# Altium PCB Graviton.PcbDoc
Units mm, origin at the board's own origin, x right, y up, seen from the top; angles counter-clockwise.
Board outline 200 x 200 mm, 10 copper layers (Top Layer, Signal Layer 1, Signal Layer 2, Signal Layer 3, Signal Layer 4, Signal Layer 5, Signal Layer 6, Signal Layer 7, Signal Layer 8, Bottom Layer), stack 1.555 mm thick; 32 components, 1 nets, 32 pads, 0 vias.
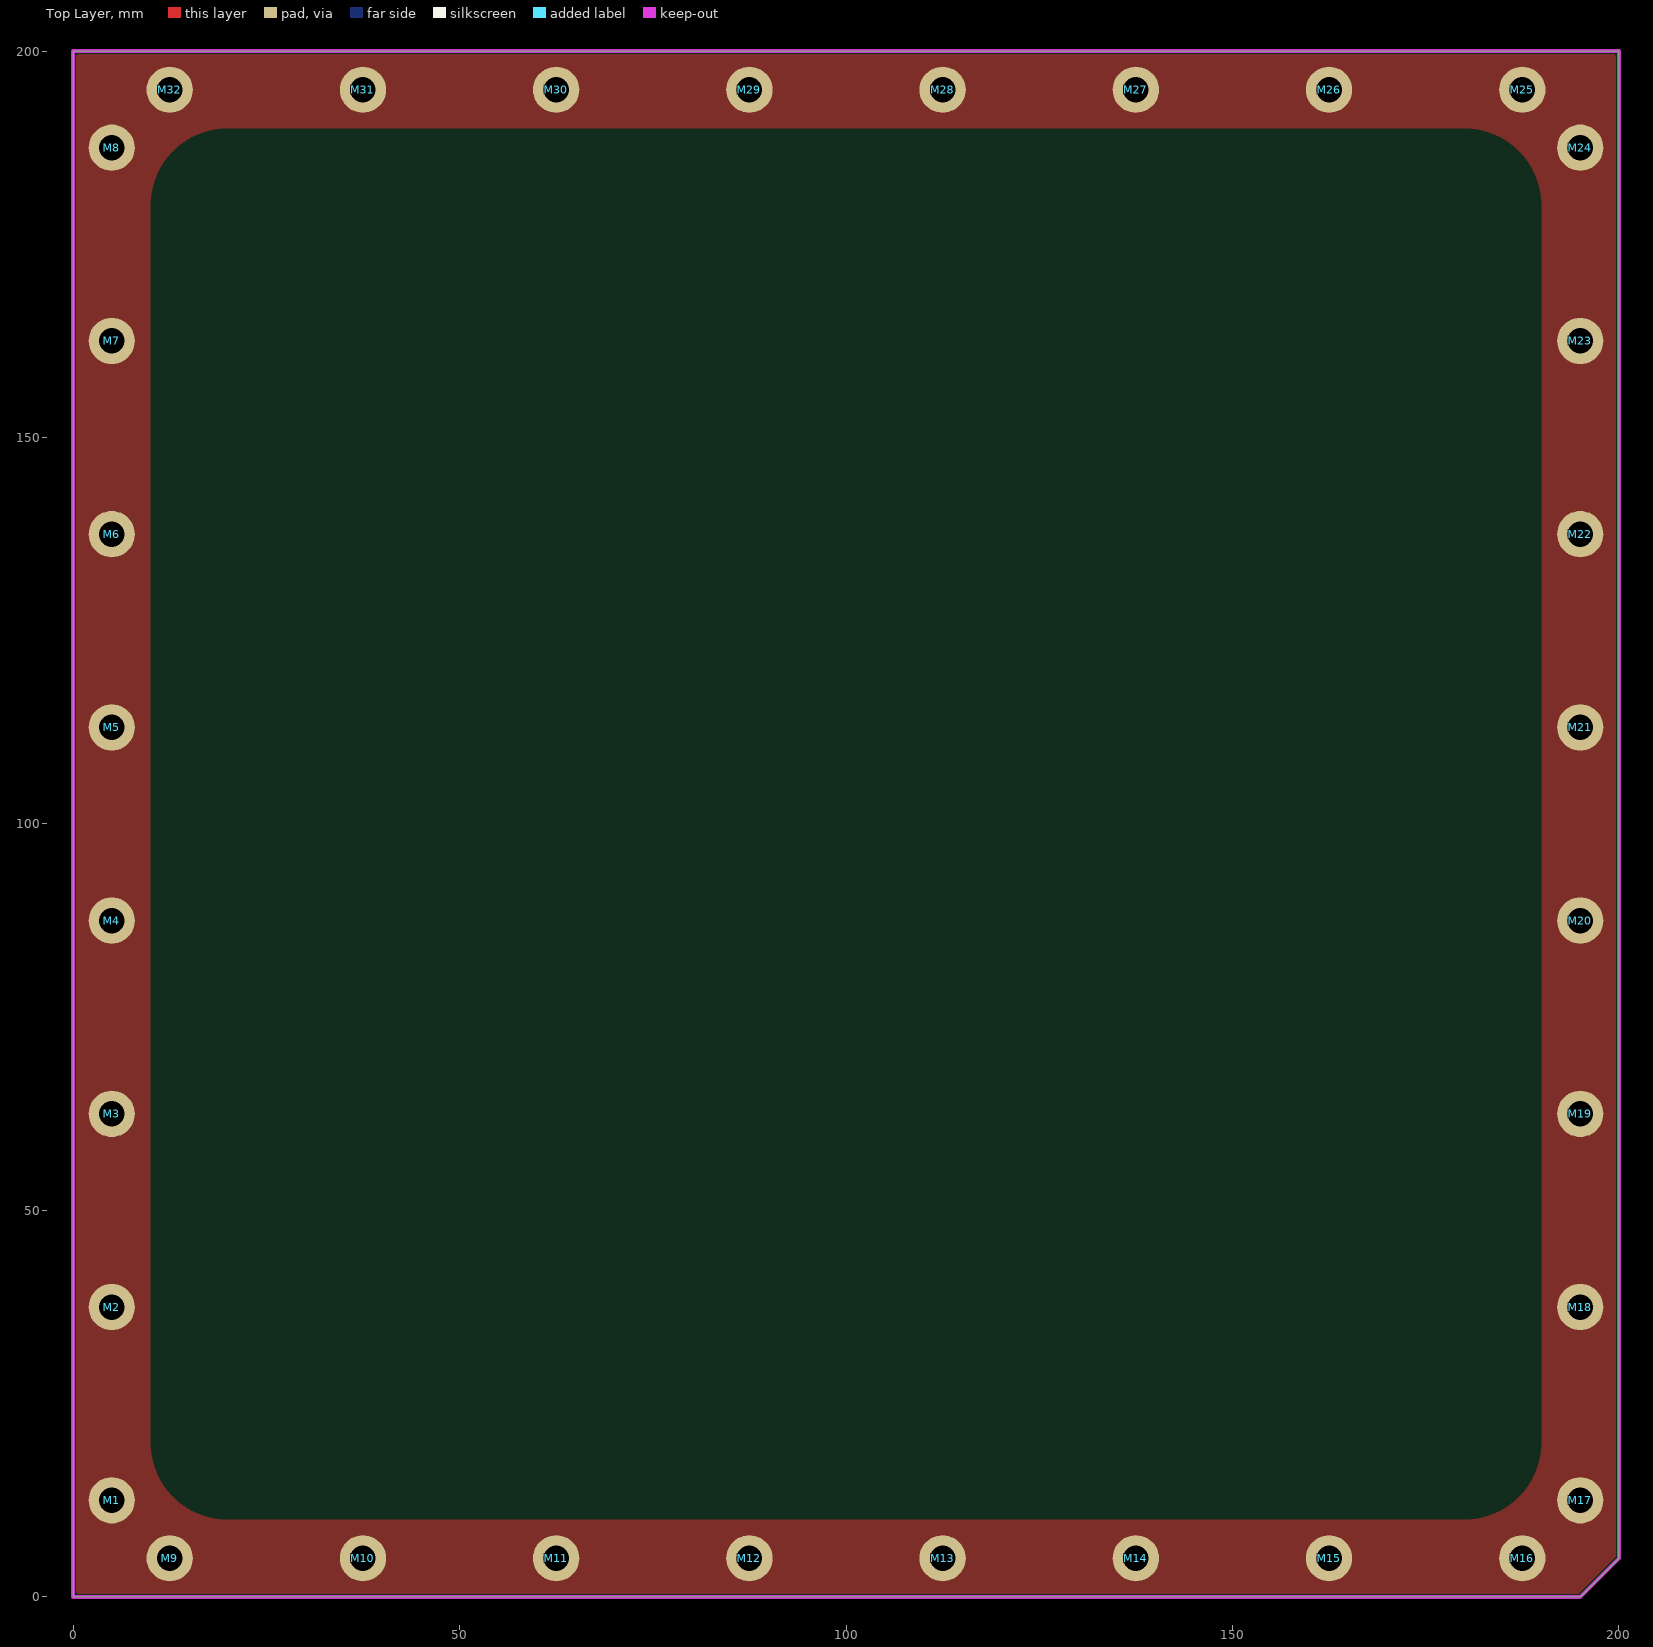
[diagram p0: Top Layer view]
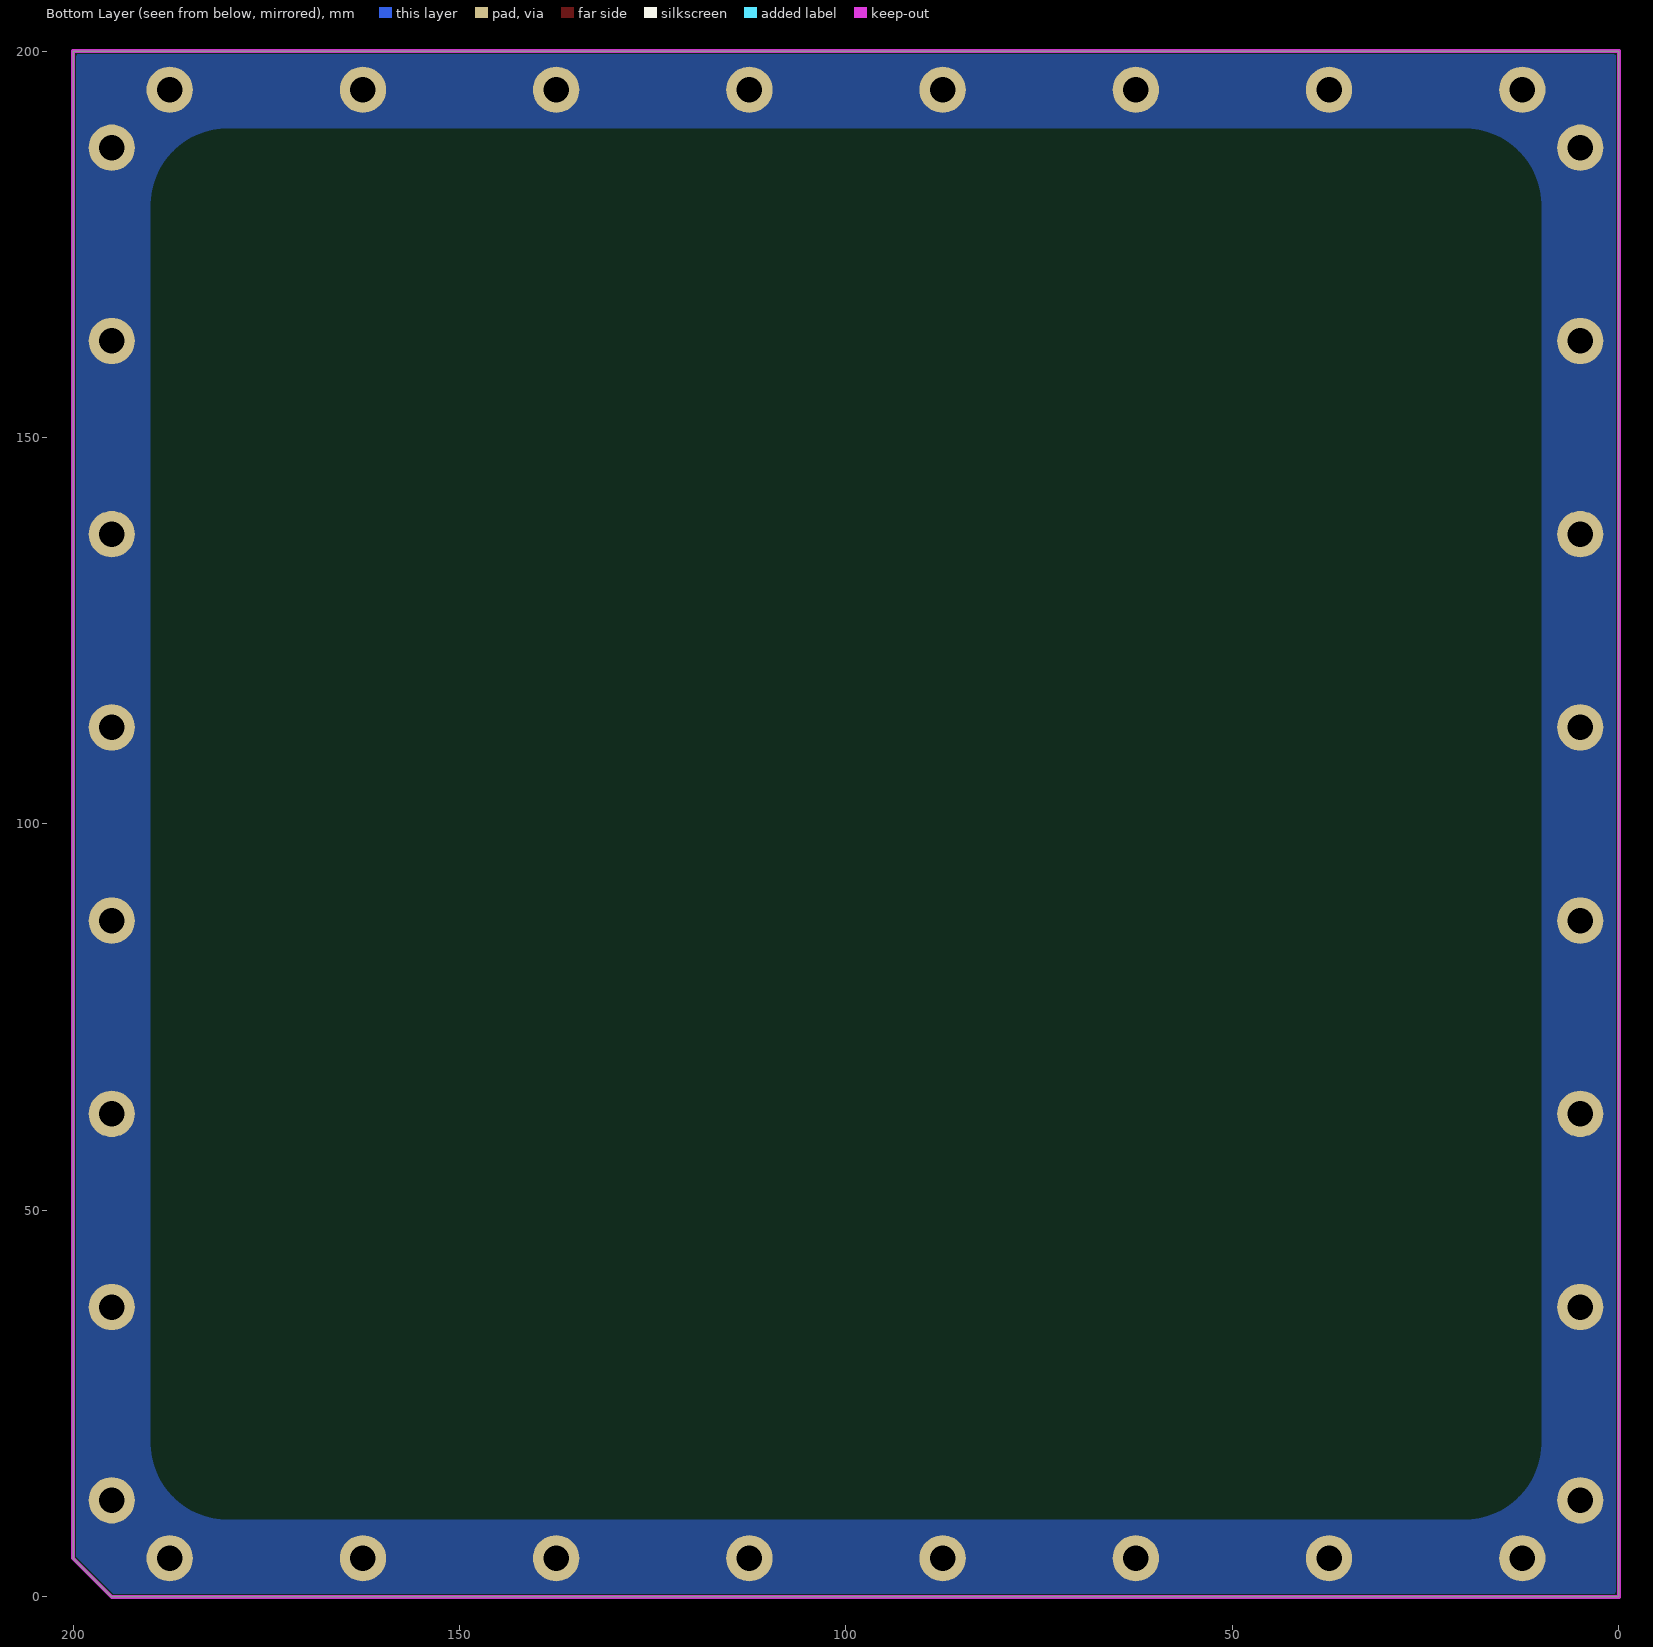
[diagram p1: Bottom Layer view, seen from below]

## Layer stack, top to bottom
Top Solder: solder mask 0.0102, Solder Resist, Dk 3.5
Top Layer: signal copper 0.036
Dielectric1: core 0.1448, FR408, Dk 3.67
Signal Layer 1: signal copper 0.018
Dielectric 3: prepreg 0.1448, FR408, Dk 3.67
Signal Layer 2: signal copper 0.018
Dielectric 4: core 0.1448, FR408, Dk 3.67
Signal Layer 3: signal copper 0.018
Dielectric 5: prepreg 0.1448, FR408, Dk 3.67
Signal Layer 4: signal copper 0.036
Dielectric 6: core 0.1448, FR408, Dk 3.67
Signal Layer 5: signal copper 0.036
Dielectric 7: prepreg 0.1448, FR408, Dk 3.67
Signal Layer 6: signal copper 0.018
Dielectric 8: core 0.1448, FR408, Dk 3.67
Signal Layer 7: signal copper 0.018
Dielectric 9: prepreg 0.1448, FR408, Dk 3.67
Signal Layer 8: signal copper 0.018
Dielectric 2: core 0.1448, FR408, Dk 3.67
Bottom Layer: signal copper 0.036
Bottom Solder: solder mask 0.0102, Solder Resist, Dk 3.5

## Board outline
0,0 195,0 200,5 200,200 0,200

## Design rules (kind name [scope] priority, off if disabled: settings)
Clearance [All] p1: gap=0.127
ComponentClearance [All] p1 off: gap=0.254 collisioncheckmode=3 verticalgap=0.254 showdistances=FALSE
HoleSize [All] p1: absolutevalues=TRUE maxlimit=25.4 minlimit=0.254 maxpercent=80.000 minpercent=20.000
PolygonConnect [All] p1: connectstyle=Direct reliefconductorwidth=0.254 reliefentries=4 polygonreliefangle="90 Angle" airgapwidth=0.254
RoutingVias [All] p1: holewidth=0.711 width=1.27 viastyle="Through Hole" minholewidth=0.711 minwidth=1.27 maxholewidth=0.711 maxwidth=1.27
SilkToSolderMaskClearance SilkscreenOverComponentPads [IsPad] p1: minsilkscreentomaskgap=0.254 clearancetoexposedcopper=TRUE
SolderMaskExpansion [All] p1: expansion=0.102
Width [All] p1: maxlimit=500 minlimit=0.254 preferedwidth=0.254
27 further rules are at their usual default settings.

## Classes and differential pairs
channel class sdram: SDRAM1 SDRAM2 SDRAM3 SDRAM4 SDRAM5 SDRAM6 SDRAM7 SDRAM8
channel class fpga: FPGA1 FPGA2 FPGA3 FPGA4 FPGA5 FPGA6 FPGA7 FPGA8 FPGA9 FPGA10 FPGA11 FPGA12 FPGA13 FPGA14 FPGA15 FPGA16 FPGA17

## Components (designator, comment, footprint, x,y, rotation, side; value= is the part's Value field where it differs from the comment)
M1 "MOUNT" MOUNTM3 5,12.5 r0 top
M2 "MOUNT" MOUNTM3 5,37.5 r0 top
M3 "MOUNT" MOUNTM3 5,62.5 r0 top
M4 "MOUNT" MOUNTM3 5,87.5 r0 top
M5 "MOUNT" MOUNTM3 5,112.5 r0 top
M6 "MOUNT" MOUNTM3 5,137.5 r0 top
M7 "MOUNT" MOUNTM3 5,162.5 r0 top
M8 "MOUNT" MOUNTM3 5,187.5 r0 top
M9 "MOUNT" MOUNTM3 12.5,5 r0 top
M10 "MOUNT" MOUNTM3 37.5,5 r0 top
M11 "MOUNT" MOUNTM3 62.5,5 r0 top
M12 "MOUNT" MOUNTM3 87.5,5 r0 top
M13 "MOUNT" MOUNTM3 112.5,5 r0 top
M14 "MOUNT" MOUNTM3 137.5,5 r0 top
M15 "MOUNT" MOUNTM3 162.5,5 r0 top
M16 "MOUNT" MOUNTM3 187.5,5 r0 top
M17 "MOUNT" MOUNTM3 195,12.5 r90 top
M18 "MOUNT" MOUNTM3 195,37.5 r90 top
M19 "MOUNT" MOUNTM3 195,62.5 r90 top
M20 "MOUNT" MOUNTM3 195,87.5 r90 top
M21 "MOUNT" MOUNTM3 195,112.5 r90 top
M22 "MOUNT" MOUNTM3 195,137.5 r90 top
M23 "MOUNT" MOUNTM3 195,162.5 r90 top
M24 "MOUNT" MOUNTM3 195,187.5 r90 top
M25 "MOUNT" MOUNTM3 187.5,195 r180 top
M26 "MOUNT" MOUNTM3 162.5,195 r180 top
M27 "MOUNT" MOUNTM3 137.5,195 r180 top
M28 "MOUNT" MOUNTM3 112.5,195 r180 top
M29 "MOUNT" MOUNTM3 87.5,195 r180 top
M30 "MOUNT" MOUNTM3 62.5,195 r180 top
M31 "MOUNT" MOUNTM3 37.5,195 r180 top
M32 "MOUNT" MOUNTM3 12.5,195 r180 top

## Footprints (in the part's own frame and the unit in brackets; to place one, negate y for a bottom-side part, rotate by r counter-clockwise, add the part's x,y. Pads: shape width x height; smd on the part's side, far side on the other; paste and mask are expansions set on the pad)
MOUNTM3 [mm] "M3 Standard Fit Hole"
  round 6 hole 3.3 paste+0: 1(0,0)

## Part data
M1 M2 M3 M4 M5 M6 M7 M8 M9 M10 M11 M12 M13 M14 M15 M16 M17 M18 M19 M20 M21 M22 M23 M24 M25 M26 M27 M28 M29 M30 M31 M32: "M3 Standard Fit Hole"

## Nets (pads, with @x,y where several pads share a name; then routed paths per layer and width w, separated by ;. In a path a pad name is that pad's centre, name@x,y a point inside that pad or via, vN(x,y) a via of type N, cw(c..) or ccw(c..) an arc to the next point about the centre after c; other vN are vias at no path point)
GND: M1.1 M2.1 M3.1 M4.1 M5.1 M6.1 M7.1 M8.1 M9.1 M10.1 M11.1 M12.1 M13.1 M14.1 M15.1 M16.1 M17.1 M18.1 M19.1 M20.1 M21.1 M22.1 M23.1 M24.1 M25.1 M26.1 M27.1 M28.1 M29.1 M30.1 M31.1 M32.1

## Polygon pours and split planes (outlines as drawn)
GND on Top Layer "TOP-GND-MOUNT" (solid, remove dead copper, pour order 16): 0,0 12.929,12.929 ccw(c20,20) 20,10 180,10 ccw(c180,20) 187.071,12.929 200,0
GND on Top Layer "TOP-GND-MOUNT" (solid, remove dead copper, pour order 14): 200,0 187.071,12.929 ccw(c180,20) 190,20 190,180 ccw(c180,180) 187.071,187.071 200,200
GND on Top Layer "TOP-GND-MOUNT" (solid, remove dead copper, pour order 12): 200,200 187.071,187.071 ccw(c180,180) 180,190 20,190 ccw(c20,180) 12.929,187.071 0,200
GND on Top Layer "TOP-GND-MOUNT" (solid, remove dead copper, pour order 10): 0,200 12.929,187.071 ccw(c20,180) 10,180 10,20 ccw(c20,20) 12.929,12.929 0,0
GND on Bottom Layer "BOT-GND-MOUNT" (solid, remove dead copper, pour order 2): 0,0 12.929,12.929 ccw(c20,20) 20,10 180,10 ccw(c180,20) 187.071,12.929 200,0
GND on Bottom Layer "BOT-GND-MOUNT" (solid, remove dead copper, pour order 4): 200,0 187.071,12.929 ccw(c180,20) 190,20 190,180 ccw(c180,180) 187.071,187.071 200,200
GND on Bottom Layer "BOT-GND-MOUNT" (solid, remove dead copper, pour order 6): 200,200 187.071,187.071 ccw(c180,180) 180,190 20,190 ccw(c20,180) 12.929,187.071 0,200
GND on Bottom Layer "BOT-GND-MOUNT" (solid, remove dead copper, pour order 8): 0,200 12.929,187.071 ccw(c20,180) 10,180 10,20 ccw(c20,20) 12.929,12.929 0,0

## Keep-outs
Keep-Out Layer:
  the board outline again, w0.508

## Silkscreen, mask and mechanical layers (free items; w line width, h text height)
Top Solder:
  region: 0,0 195,0 197.5,2.5 187,13 cw(c180,20) 180,10.1 20,10.1 cw(c20,20) 13,13
  region: 200,200 200,5 197.5,2.5 187,13 ccw(c180,20) 189.9,20 189.9,180 ccw(c180,180) 187,187
  region: 200,200 187,187 ccw(c180,180) 180,189.9 20,189.9 ccw(c20,180) 13,187 0,200
  region: 0,200 13,187 ccw(c20,180) 10.1,180 10.1,20 ccw(c20,20) 13,13 0,0
Bottom Solder:
  region: 0,0 195,0 197.5,2.5 187,13 cw(c180,20) 180,10.1 20,10.1 cw(c20,20) 13,13
  region: 200,200 200,5 197.5,2.5 187,13 ccw(c180,20) 189.9,20 189.9,180 ccw(c180,180) 187,187
  region: 200,200 187,187 ccw(c180,180) 180,189.9 20,189.9 ccw(c20,180) 13,187 0,200
  region: 0,200 13,187 ccw(c20,180) 10.1,180 10.1,20 ccw(c20,20) 13,13 0,0
Mechanical 2:
  lines w0.254: 0,0 195,0 197.5,2.5 200,5 200,200 0,200 0,0 ; 187,13 187,13
Mechanical 16:
  drawing of 777 lines, arcs and shapes, not listed
  text "1" at -23.676,218.971 h1.78
  text "2" at 46.191,218.971 h1.78
  text "3" at 115.914,218.971 h1.78
  text "4" at 185.789,218.971 h1.78
  text "REV" at 255.69,213.51 h1.7
  text "DATE" at 270.93,213.51 h1.7
  text "DESC" at 283.63,213.51 h1.7
  text "ENG" at 354.75,213.51 h1.7
  text "1" at 255.69,208.43 h1.7
  text "*" at 270.93,208.43 h1.7
  text "INITIAL RELEASE" at 283.63,208.43 h1.7
  text "*" at 354.75,208.43 h1.7
  text "A" at -56.095,129.614 h1.78
  text "A" at 370.625,129.614 h1.78
  text "B" at -56.095,75.639 h1.78
  text "B" at 370.625,75.639 h1.78
  text "C" at -56.095,21.664 h1.78
  text "C" at 370.625,21.664 h1.78
  text "ENGINEER:" at 255.69,-23.98 h1.14
  text "TITLE:" at 293.79,-23.98 h1.14
  text "ALL DIMENSIONS ARE IN MM (INCHES)" at 185.205,-25.885 h1.2
  text "Brinton Engineering LLC" at 221.4,-25.885 h1.78
  text "*" at 255.69,-27.155 h1.78
  text "4 Avocet Drive 209" at 221.4,-28.425 h1.78
  text "TOLERANCES:" at 196.254,-30.076 h1.2
  text "Redwood City CA 94065" at 221.4,-30.965 h1.78
  text "*" at 294.425,-30.965 h2.2
  text "PCB DESIGNER:" at 255.69,-31.473 h1.14
  text "D" at -56.095,-32.184 h1.78
  text "D" at 370.625,-32.184 h1.78
  text "DECIMALS" at 185.205,-32.87 h1.2
  text "(858) 414 1421" at 221.4,-33.505 h1.78
  text "*" at 255.69,-34.775 h1.78
  text ".X     0.1" at 185.205,-36.045 h1.2
  text ".XX    0.05" at 185.205,-38.585 h1.2
  text "DATE:" at 255.69,-39.22 h1.14
  text "PART NO.:" at 293.79,-39.22 h1.14
  text "REV:" at 347.13,-39.22 h1.14
  text ".XXX   0.005" at 185.205,-41.125 h1.2
  text "*" at 255.69,-42.395 h1.7
  text "-" at 293.79,-42.395 h1.78
  text "1" at 347.13,-42.395 h1.78
  text "*UNLESS OTHERWISE NOTED" at 184.57,-46.84 h1.2
  text "FILE NAME:" at 255.69,-46.84 h1.14
  text "DWG NO:" at 293.79,-46.84 h1.14
  text "SCALE:" at 347.13,-46.84 h1.14
  text ".PCB_FILE_NAME_NO_PATH" at 256.96,-49.888 h1.78
  text "-" at 293.79,-50.015 h1.78
  text "1:1" at 347.13,-50.015 h1.78
  text "1" at -23.676,-55.349 h1.78
  text "2" at 46.191,-55.349 h1.78
  text "3" at 115.914,-55.349 h1.78
  text "4" at 185.789,-55.349 h1.78
Drill Drawing:
  lines w0.125: 269.77,122.78 271.04,124.05 ; 269.77,125.32 271.04,126.59 ; 271.04,122.78 272.31,124.05 ; 271.04,125.32 272.31,126.59 ; 272.31,122.78 273.58,124.05 ; 272.31,125.32 273.58,126.59 ; 273.58,122.78 274.85,124.05 ; 273.58,125.32 274.85,126.59 ; 274.85,122.78 276.12,124.05 ; 274.85,125.32 276.12,126.59 ; 276.12,122.78 277.39,124.05 ; 276.12,125.32 277.39,126.59 ; 277.39,122.78 278.66,124.05 ; 277.39,125.32 278.66,126.59 ; 278.66,122.78 279.93,124.05 ; 278.66,125.32 279.93,126.59 ; 279.93,122.78 281.2,124.05 ; 279.93,125.32 281.2,126.59 ; 281.2,122.78 282.47,124.05 ; 281.2,125.32 282.47,126.59
  lines w0.254: 240.56,115.795 240.56,138.02 309.14,138.02 309.14,115.795 ; 240.56,115.875 309.14,115.875 309.14,113.335 308.505,113.335 285.01,113.335 285.01,115.875 ; 240.56,118.335 309.14,118.335 ; 240.56,120.875 309.14,120.875 ; 240.56,123.415 268.5,123.415 ; 240.56,125.955 268.5,125.955 ; 240.56,128.495 309.14,128.495 ; 240.56,131.035 309.14,131.035 ; 240.56,134.21 309.14,134.21 ; 253.26,115.795 253.26,138.02 ; 270.024,117.319 270.278,117.319 ; 270.024,132.559 270.278,132.559 ; 270.786,116.811 271.04,116.811 ; 270.786,132.051 271.04,132.051 ; 271.04,124.177 281.2,124.177 ; 271.04,124.431 281.2,124.431 ; 271.04,124.685 281.2,124.685 ; 271.04,124.812 281.2,124.812 ; 271.04,125.066 281.2,125.066 ; 271.04,125.32 271.04,124.05 ; 271.548,117.319 271.802,117.319 ; 271.548,132.559 271.802,132.559 ; 272.31,116.811 272.564,116.811 ; 272.31,132.051 272.564,132.051 ; 273.072,117.319 273.326,117.319 ; 273.072,132.559 273.326,132.559 ; 273.834,116.811 274.088,116.811 ; 273.834,132.051 274.088,132.051 ; 274.596,117.319 274.85,117.319 ; 274.596,132.559 274.85,132.559 ; 275.358,116.811 275.612,116.811 ; 275.358,132.051 275.612,132.051 ; 276.12,117.319 276.374,117.319 ; 276.12,132.559 276.374,132.559 ; 276.882,116.811 277.136,116.811 ; 276.882,132.051 277.136,132.051 ; 277.644,117.319 277.898,117.319 ; 277.644,132.559 277.898,132.559 ; 278.406,116.811 278.66,116.811 ; 278.406,132.051 278.66,132.051 ; 279.168,117.319 279.422,117.319 ; 279.168,132.559 279.422,132.559 ; 279.93,116.811 280.184,116.811 ; 279.93,132.051 280.184,132.051 ; 280.692,117.319 280.946,117.319 ; 280.692,132.559 280.946,132.559 ; 281.2,125.32 281.2,124.05 ; 281.454,116.811 281.708,116.811 ; 281.454,132.051 281.708,132.051 ; 282.216,117.319 282.47,117.319 ; 282.216,132.559 282.47,132.559 ; 285.01,115.795 285.01,138.02 ; 285.01,123.415 309.14,123.415 ; 285.01,125.955 309.14,125.955 ; 271.04,124.05 269.77,124.05 269.77,122.78 282.47,122.78 282.47,124.05 281.2,124.05 ; 271.04,124.05 281.2,124.05 ; 269.77,116.43 282.47,116.43 282.47,117.7 269.77,117.7 269.77,116.43 ; 269.77,118.97 282.47,118.97 282.47,120.24 269.77,120.24 269.77,118.97 ; 269.77,125.32 282.47,125.32 282.47,126.59 269.77,126.59 269.77,125.32 ; 269.77,129.13 269.77,130.4 282.47,130.4 282.47,129.13 269.77,129.13 ; 269.77,131.67 269.77,132.94 282.47,132.94 282.47,131.67 269.77,131.67
  text "1. LEAD-FREE HASL" at 241.83,153.58 h1.14
  text "2. SOLDERMASK: GREEN" at 241.83,151.04 h1.14
  text "3. SILKSCREEN: WHITE" at 241.83,148.5 h1.14
  text "4. NO BOTTOM SOLDERMASK" at 241.83,145.96 h1.14
  text "LAYER" at 241.83,135.48 h1.14
  text "FINISH" at 286.28,135.48 h1.14
  text "SILK SCREEN" at 254.53,131.67 h1.14
  text "SOLDER MASK" at 254.53,129.13 h1.14
  text "1 (TOP) S" at 241.83,126.59 h1.14
  text "COPPER (1oz.)" at 254.53,126.59 h1.14
  text "0.036 (0.0014)" at 285.645,126.59 h1.14
  text "PHENOLIC (FR-4)" at 254.53,124.05 h1.14
  text "1.57 (0.062)" at 285.645,124.05 h1.14
  text "2 (BOT) S" at 241.83,121.51 h1.14
  text "COPPER (1oz.)" at 254.53,121.51 h1.14
  text "0.036 (0.0014)" at 285.645,121.51 h1.14
  text "SOLDER MASK" at 254.53,118.97 h1.14
  text "SILK SCREEN" at 254.53,116.43 h1.14
  text "TOTAL" at 279.93,113.97 h1.14
  text "1.65 (0.065)" at 285.645,113.97 h1.14
  text ".Legend" at -41.49,-22.075 h1.2